# Altium PCB PCB_AlchemyBoxSimple_2024-01-02.pcbdoc
Units mil, origin at the board's own origin, x right, y up, seen from the top; angles counter-clockwise.
Board outline 6810 x 6015 mil, 2 copper layers (Top Layer, Bottom Layer); 48 components, 53 nets, 179 pads, 12 vias.
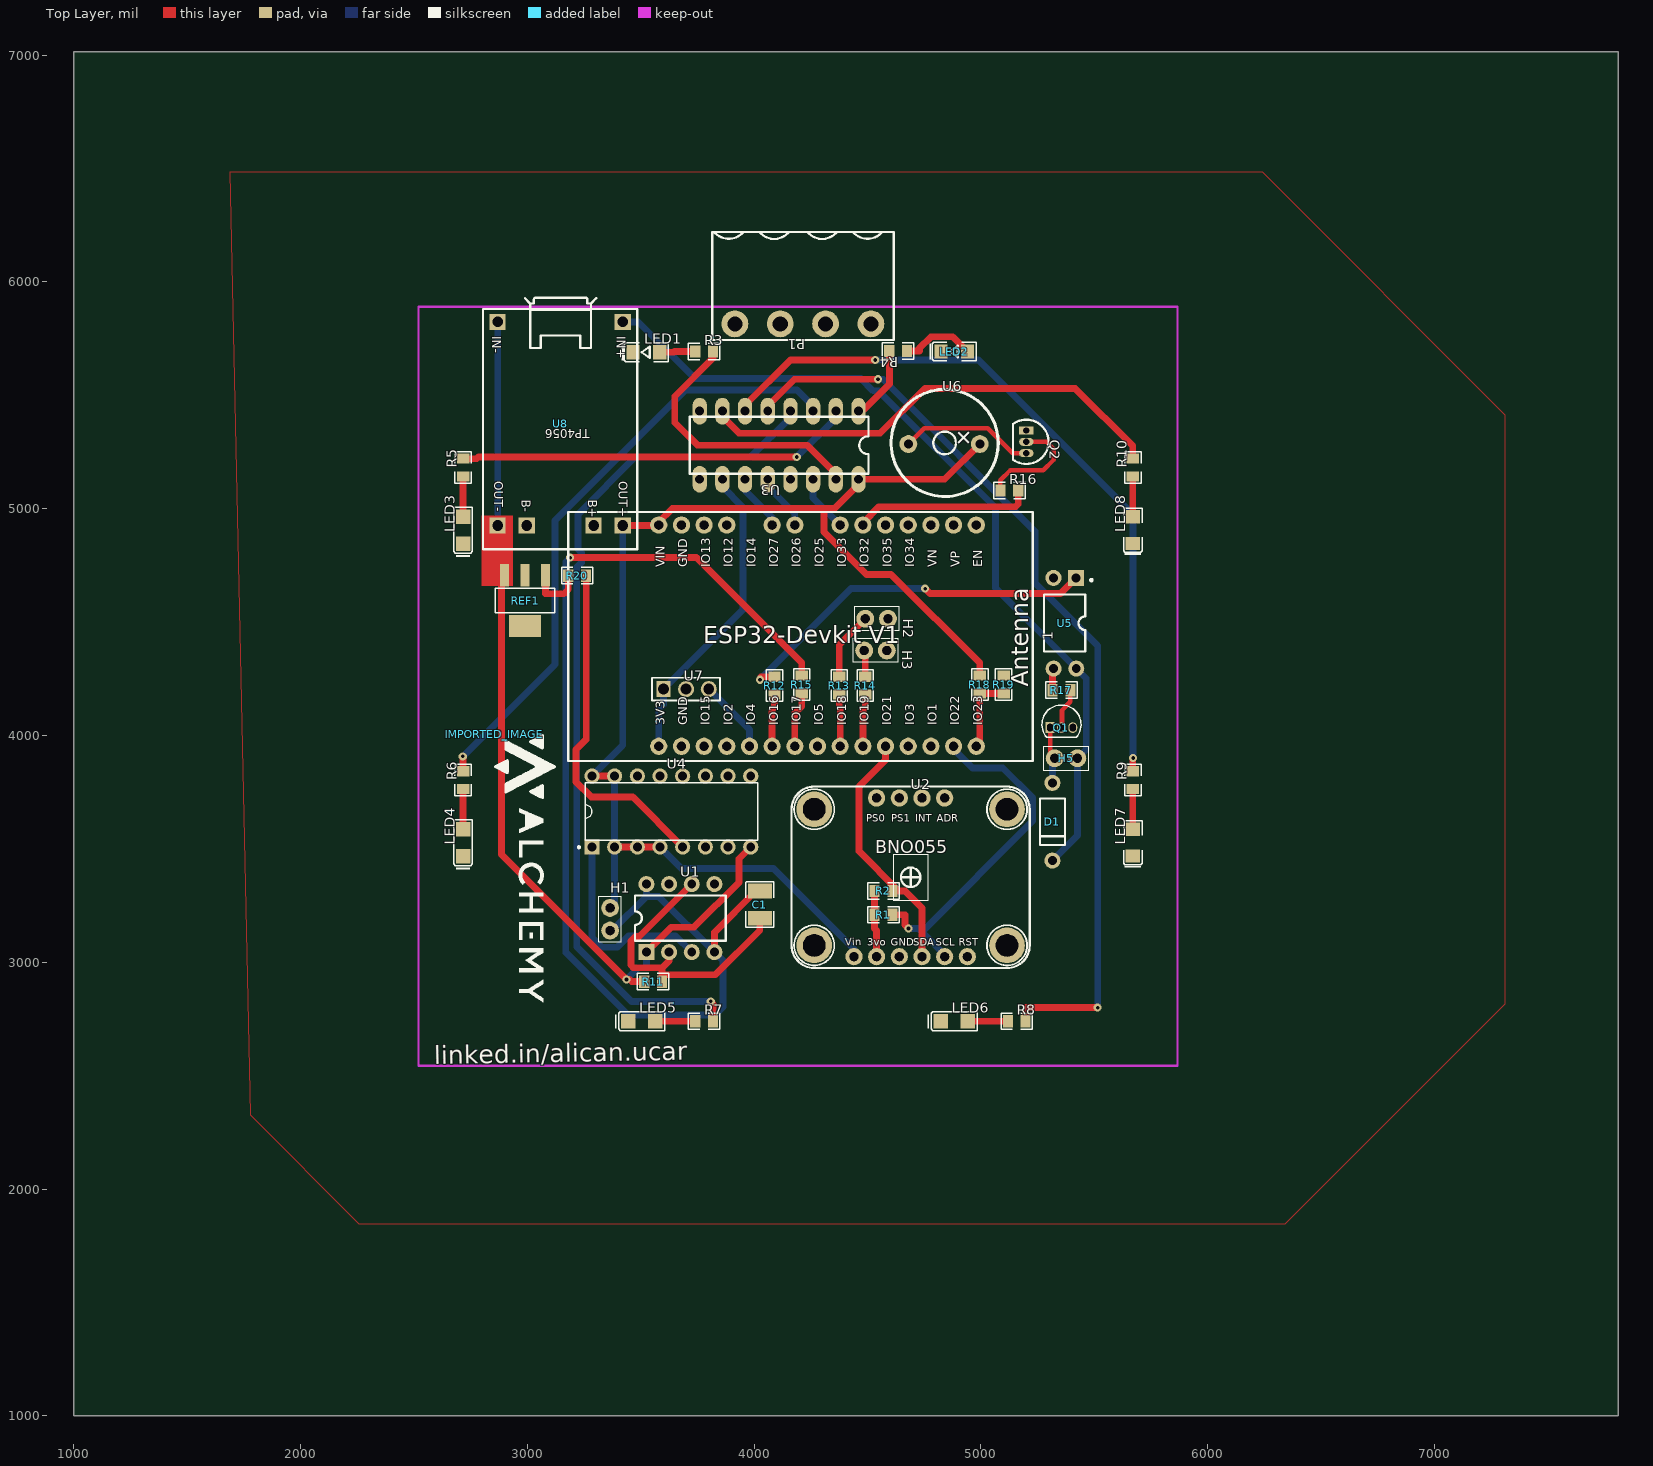
[diagram p0: Top Layer view]
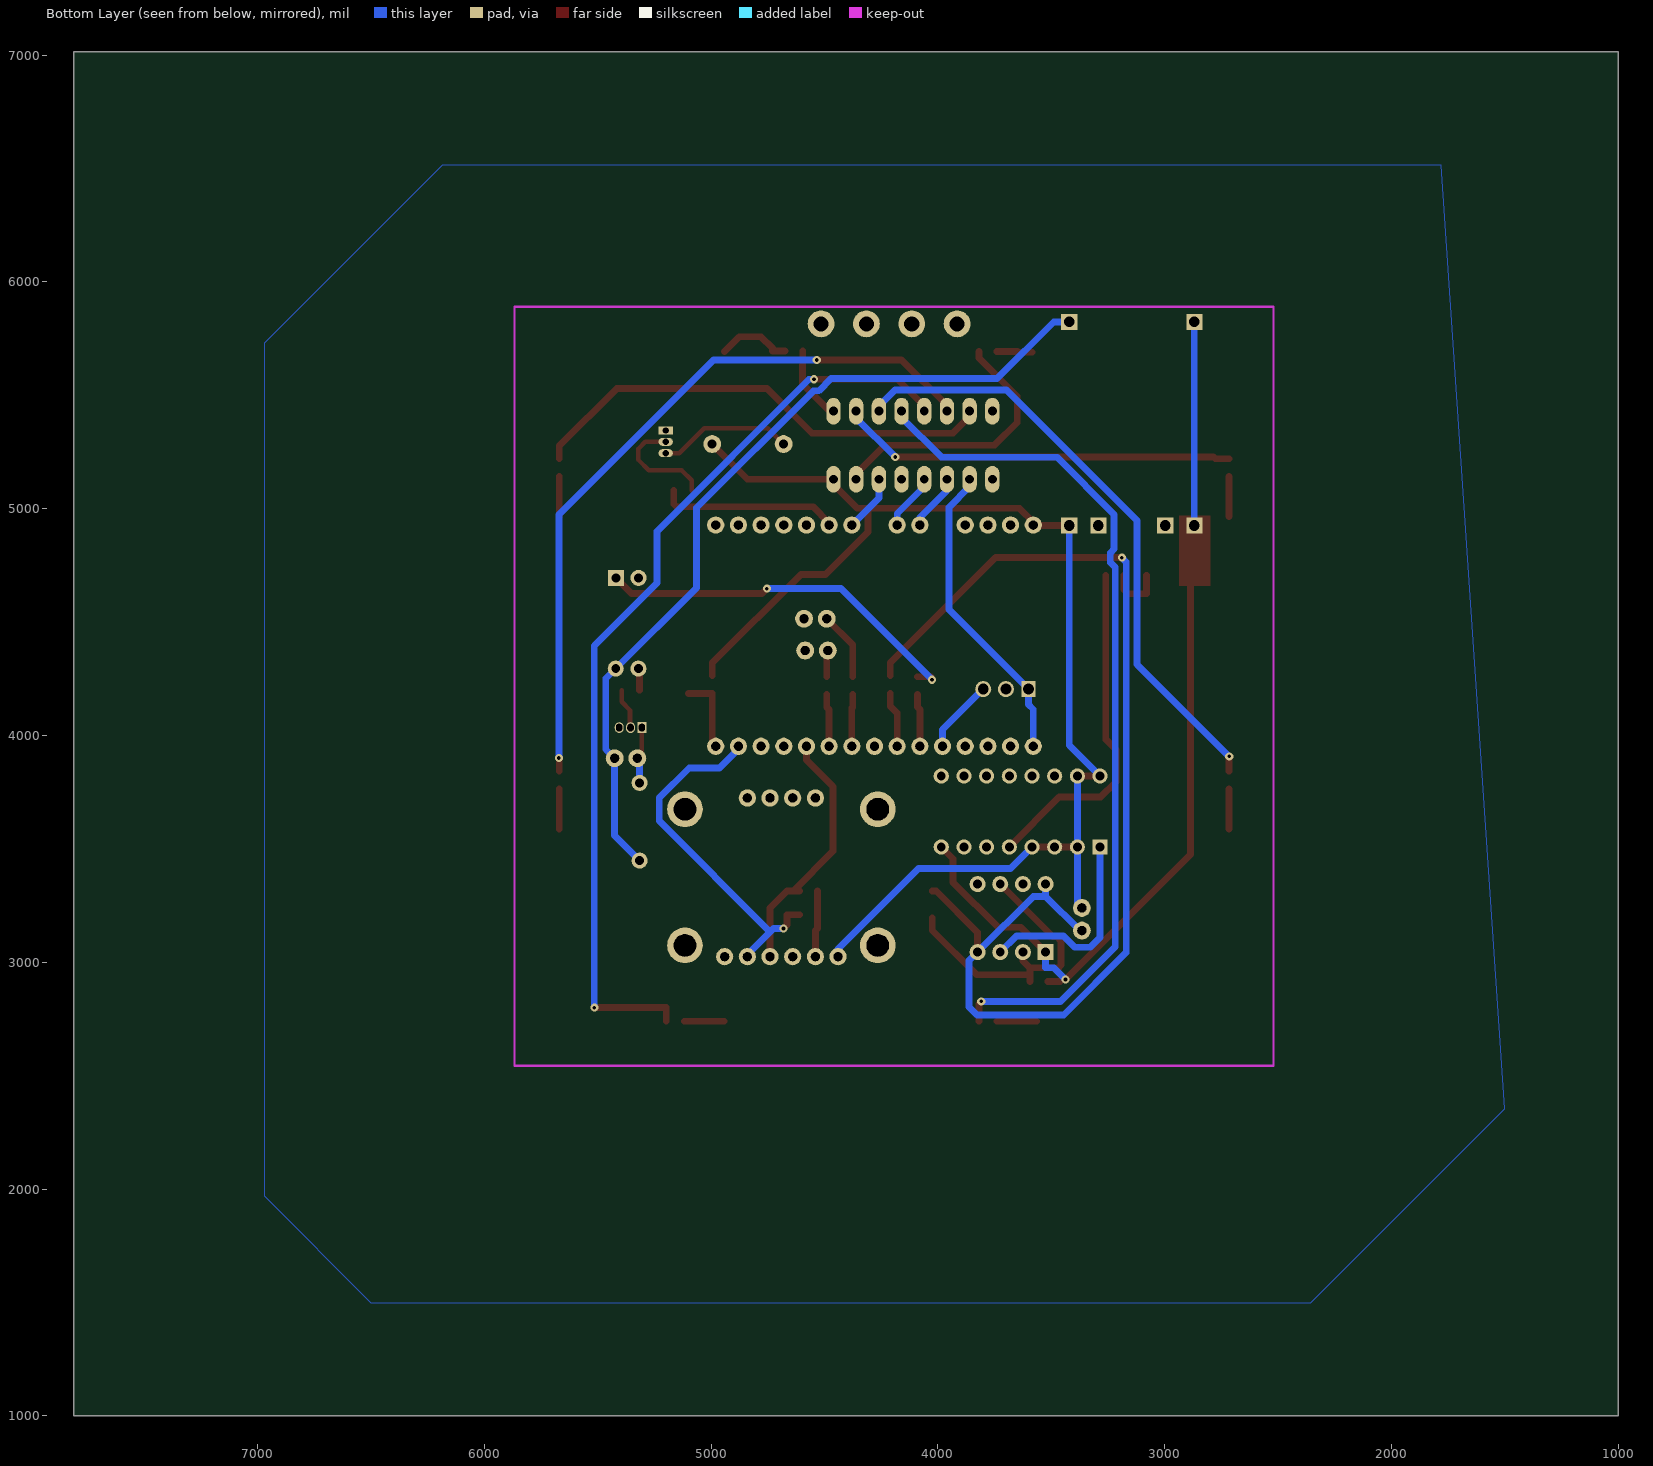
[diagram p1: Bottom Layer view, seen from below]

## Layer stack, top to bottom
Top Layer: signal copper (thickness not stored)
Dielectric: dielectric 12.6, FR-4, Dk 4.8
Bottom Layer: signal copper (thickness not stored)

## Board outline
7810,1000 1000,1000 1000,7015 7810,7015

## Components (designator, comment, footprint, x,y, rotation, side; value= is the part's Value field where it differs from the comment)
1 "ESP32 DEV KIT" ESP32-DEVKITV1_ESP32-DEVKITV1 4305,4160 r270 top
C1 "1210" C1210 4025,3255 r270 top
D1 "1N4007" DO-41_BD2.4-L4.7-P8.70-D0.9-RD 5315,3620 r90 top
H1 "Buton" CONNECTOR_PINHEADER_2.54MM:PINHEADER_1X11_P_2.54MM 3365,3240 r0 top
H2 "Buton" CONNECTOR_PINHEADER_2.54MM:PINHEADER_1X11_P_2.54MM 4590,4515 r270 top
H3 "Buton" CONNECTOR_PINHEADER_2.54MM:PINHEADER_1X11_P_2.54MM 4585,4375 r270 top
H5 "Relay" CONNECTOR_PINHEADER_2.54MM:PINHEADER_1X11_P_2.54MM 5325,3900 r90 top
IMPORTED_IMAGE "IMPORTED_IMAGE" IMPORTED_IMAGE 2855.21,4005.45 r0 top
LED1 "HL-PC-3216S9AC" LED1206-R-RD_RED 3525,5690 r0 top
LED2 "HL-PC-3216S9AC" LED1206-R-RD_RED 4882.2,5693.15 r0 top
LED3 "HL-PC-3216U51GC" LED1206-RD_GREEN 2716.85,4905.75 r90 top
LED4 "HL-PC-3216U51GC" LED1206-RD_GREEN 2716.85,3527.8 r90 top
LED5 "HL-PC-3216U32YC" LED1206-RD_YELLOW-1 3504.25,2740.4 r0 top
LED6 "HL-PC-3216U32YC" LED1206-RD_YELLOW-1 4882.2,2740.4 r0 top
LED7 "HL-PC-3216H203BC" LED1206-R-RD_BLUE 5669.6,3527.8 r90 top
LED8 "HL-PC-3216H203BC" LED1206-R-RD_BLUE 5669.6,4905.75 r90 top
P1 "KF2EDGR-X-5.08-4P" CONN-TH_4P-P5.08_KF2EDGR-X-5.08-4P 4215,5815 r180 top
Q1 "BC547" TO-92-3_L4.5-W3.5-P1.27-L 5355,4035 r0 top
Q2 "2N4401-C118540" TO-92-3_L4.9-W3.7-P1.27-L 5200,5295 r270 top
R1 "3.3kΩ" R0805 4570,3210 r180 top
R2 "3.3kΩ" R0805 4570,3315 r180 top
R3 "110RED" R0805 3779.84,5693.15 r0 top
R4 "110RED" R0805 4635,5695 r180 top
R5 "80Green" R0805 2716.85,5181.34 r90 top
R6 "80Green" R0805 2716.85,3803.39 r90 top
R7 "110Yellow" R0805 3779.84,2740.4 r0 top
R8 "110Yellow" R0805 5157.79,2740.4 r0 top
R9 "80Blue" R0805 5669.6,3803.39 r90 top
R10 "80Blue" R0805 5669.6,5181.34 r90 top
R11 "27K" R0805 3555,2915 r180 top
R12 "80Blue" R0805 4090,4220 r90 top
R13 "10K" R0805 4375,4220 r90 top
R14 "10K" R0805 4490,4220 r90 top
R15 "10K" R0805 4210,4225 r270 top
R16 "1K" R0805 5125,5080 r0 top
R17 "1K" R0805 5355,4200 r180 top
R18 "1K" R0805 4995,4225 r90 top
R19 "1K" R0805 5100,4225 r270 top
R20 "1K" R0805 3220,4705 r0 top
REF1 "IRFL014NTRPBF" SOT-223-4_L6.5-W3.5-P2.30-LS7.0-BR 2990,4595 r90 top
U1 "TLC555CP" DIP-8_L9.7-W6.4-P2.54-LS7.6-BL 3675,3195 r0 top
U2 "BNO055" ADAFRUIT-BNO055 4690,2975 r0 top
U3 "74HC595" 74HC595 4110,5280 r180 top
U4 "SN74HC112N" PDIP-16_L19.3-W6.4-P2.54-LS7.9-BL 3635,3665 r0 top
U5 "EL817MB" DIP-4_L6.5-W4.6-P2.54-LS10.2-BL 5370,4495 r180 top
U6 "Buzzer_Active_12x8" BUZZER_ACTIVE_12X8 4840,5290 r0 top
U7 "microphone" HDR-TH_3P-P2.54-V-M-1 3700,4205 r0 top
U8 "TP4056" TP4056 3145,5375 r180 top

## Footprints (in the part's own frame and the unit in brackets; to place one, negate y for a bottom-side part, rotate by r counter-clockwise, add the part's x,y. Pads: shape width x height; smd on the part's side, far side on the other; paste and mask are expansions set on the pad)
74HC595 [mm]
  oval 1.6x3 hole 1 paste+0 mask+0.051: 1(-8.89,-3.81) 2(-6.35,-3.81) 3(-3.81,-3.81) 4(-1.27,-3.81) 5(1.27,-3.81) 6(3.81,-3.81) 7(6.35,-3.81) 8(8.89,-3.81) 9(8.89,3.81) 10(6.35,3.81) 11(3.81,3.81) 12(1.27,3.81) 13(-1.27,3.81) 14(-3.81,3.81) 15(-6.35,3.81) 16(-8.89,3.81)
  silkscreen extent -10,-3.2 10,3.2
ADAFRUIT-BNO055 [mil]
  round 76 hole 39.36 paste+0 mask+4: 1(-250,50) 2(-150,50) 3(-50,50) 4(50,50) 5(150,50) 6(250,50) 7(150,750) 8(50,750) 9(-50,750) 10(-150,750)
  round 157.48 hole 98.42 slot 98.62 at 0 deg paste+0 mask+4: P$1(-425,100) P$1(-425,700) P$1(425,100) P$1(425,700)
  silkscreen extent -525,0 525,800
BUZZER_ACTIVE_12X8 [mm]
  round 2 hole 1 paste+0 mask+0.102: 1(3.937,-0.127) 2(-4.064,-0.127)
  silkscreen extent -6,-6 6,6
C1210 [mm]
  rect 1.635x2.7 smd paste-100 mask+0.051: 1(-1.517,0) 2(1.517,0)
  silkscreen extent -2.56,-1.58 2.56,1.58
CONN-TH_4P-P5.08_KF2EDGR-X-5.08-4P [mm]
  round 3 hole 1.7 paste+0 mask+0.051: 1(-7.62,0) 2(-2.54,0) 3(2.54,0) 4(7.62,0)
  silkscreen extent -10.16,-10.3 10.16,1.8
CONNECTOR_PINHEADER_2.54MM:PINHEADER_1X11_P_2.54MM [mm]
  round 2 hole 1 slot 1.005 at 0 deg paste+0 mask+0.051: 1(0,0) 2(0,-2.54)
  silkscreen extent -1.33,-3.8 1.27,1.27
DIP-4_L6.5-W4.6-P2.54-LS10.2-BL [mm]
  rect 1.8x1.8 hole 1 paste+0 mask+0.051: 1(-1.265,-5.08)
  round 1.8 hole 1 paste+0 mask+0.051: 2(1.275,-5.08) 3(1.265,5.08) 4(-1.275,5.08)
  silkscreen extent -3.1,-4.97 2.35,3.17
DIP-8_L9.7-W6.4-P2.54-LS7.6-BL [mm]
  rect 1.8x1.8 hole 1 paste+0 mask+0.05: 1(-3.81,-3.81)
  round 1.8 hole 1 paste+0 mask+0.05: 2(-1.27,-3.81) 3(1.27,-3.81) 4(3.81,-3.81) 5(3.81,3.81) 6(1.27,3.81) 7(-1.27,3.81) 8(-3.81,3.81)
  silkscreen extent -5.08,-2.53 5.08,2.53
DO-41_BD2.4-L4.7-P8.70-D0.9-RD [mm]
  round 1.8 hole 1 paste+0 mask+0.051: 1(-4.35,0) 2(4.35,0)
  silkscreen extent -2.6,-1.4 2.6,1.4
ESP32-DEVKITV1_ESP32-DEVKITV1 [mil]
  round 76 hole 39.36 paste+0 mask+2: 3V3(207.32,-725.64) D2(207.32,-425.64) D4(207.32,-325.64) D5(207.32,-25.64) D12(-767.89,-425.64) D13(-767.89,-525.64) D15(207.32,-525.64) D18(207.32,74.36) D19(207.32,174.36) D21(207.31,274.36) D22(207.31,574.36) D23(207.31,674.36) D26(-767.89,-125.64) D27(-767.89,-225.64) D32(-767.89,174.36) D33(-767.89,74.36) D34(-767.89,374.36) D35(-767.89,274.36) EN(-767.89,674.36) GND(207.32,-625.64) GND2(-767.89,-625.64) RX0(207.31,374.36) RX2(207.32,-225.64) TX0(207.31,474.36) TX2(207.32,-125.64) VIN(-767.89,-725.64) VN(-767.89,474.36) VP(-767.89,574.36)
  silkscreen extent -826,-1124 273,923
HDR-TH_3P-P2.54-V-M-1 [mm]
  rect 1.575x1.8 hole 1.2 paste+0 mask+0.051: 1(-2.54,0)
  round 1.8 hole 1.2 paste+0 mask+0.051: 2(0,0) 3(2.54,0)
  silkscreen extent -3.81,-1.27 3.81,1.27
IMPORTED_IMAGE [mil]
  silkscreen extent 0,-1181 270,0
LED1206-R-RD_BLUE [mm]
  rect 1.485x1.62 smd paste-100 mask+0.051: 1(1.492,0) 2(-1.493,0)
  silkscreen extent -2.77,-1.04 2.46,1.04
LED1206-R-RD_RED [mm]
  rect 1.485x1.62 smd paste-100 mask+0.051: 1(1.493,0) 2(-1.492,0)
  silkscreen extent -2.77,-1.04 2.46,1.04
LED1206-RD_GREEN [mm]
  rect 1.635x1.6 smd paste-100 mask+0.051: 1(-1.517,0) 2(1.517,0)
  silkscreen extent -2.99,-1.04 2.57,1.07
LED1206-RD_YELLOW-1 [mm]
  rect 1.635x1.6 smd paste-100 mask+0.051: 1(-1.517,0) 2(1.517,0)
  silkscreen extent -2.99,-1.04 2.57,1.07
PDIP-16_L19.3-W6.4-P2.54-LS7.9-BL [mm]
  rect 1.7x1.7 hole 1 paste+0 mask+0.051: 1(-8.89,-3.97)
  round 1.7 hole 1 paste+0 mask+0.051: 2(-6.35,-3.97) 3(-3.81,-3.97) 4(-1.27,-3.97) 5(1.27,-3.97) 6(3.81,-3.97) 7(6.35,-3.97) 8(8.89,-3.97) 9(8.89,3.97) 10(6.35,3.97) 11(3.81,3.97) 12(1.27,3.97) 13(-1.27,3.97) 14(-3.81,3.97) 15(-6.35,3.97) 16(-8.89,3.97)
  silkscreen extent -10.46,-4.1 9.65,3.2
R0805 [mil]
  rect 44.59x54.21 smd paste-3937.01 mask+2: 1(-39.37,0) 2(39.37,0)
  silkscreen extent -69,-36 69,36
SOT-223-4_L6.5-W3.5-P2.30-LS7.0-BR [mm]
  rect 2.47x0.98 smd paste+0 mask+0.051: 1(2.835,-2.3) 2(2.835,0) 3(2.835,2.3)
  rect 2.47x3.6 smd paste+0 mask+0.051: 4(-2.835,0)
  silkscreen extent -1.37,-3.33 1.37,3.33
TO-92-3_L4.5-W3.5-P1.27-L [mm]
  rect 1x1.2 hole 0.7 slot 0.85 at 90 deg paste+0 mask+0.051: 1(-1.27,0)
  oval 1x1.2 hole 0.7 slot 0.85 at 90 deg paste+0 mask+0.051: 2(0,0) 3(1.27,0)
  silkscreen extent -2.19,-1.1 2.19,2.52
TO-92-3_L4.9-W3.7-P1.27-L [mm]
  rect 0.9x1.6 hole 0.7 paste+0 mask+0.051: 1(-1.27,0)
  oval 0.9x1.6 hole 0.7 paste+0 mask+0.051: 2(0,0) 3(1.27,0)
  silkscreen extent -2.48,-1.5 2.48,2.48
TP4056 [mm]
  rect 1.8x1.8 hole 1.199 paste+0 mask+0.051: 1(-7,11.402) 2(-3.749,11.402) 3(3.749,11.402) 4(7,11.402) 5(-7,-11.402) 6(7,-11.402)
  silkscreen extent -8.63,-14.11 8.64,14.07

## Via types
v1: diameter 36.02, hole 16.02, Top Layer to Bottom Layer, tented both sides, 12 vias

## Nets (pads, with @x,y where several pads share a name; then routed paths per layer and width w, separated by ;. In a path a pad name is that pad's centre, name@x,y a point inside that pad or via, vN(x,y) a via of type N, cw(c..) or ccw(c..) an arc to the next point about the centre after c; other vN are vias at no path point)
1_RX2: 1.RX2 R12.1 | length 232.4
  Top Layer w30: 1.RX2 4079.36,4114.72 4090,4125.36 R12.1
3.3V: 1.3V3 U3.10 U7.1 | length 1368.9
  Bottom Layer w30: 1.3V3 3579.36,4115.96 3600,4136.6 U7.1 3950.92,4555.92 3950.92,5006.22 3860,5097.14 U3.10
+5V: D1.1 H5.2 U5.4 U8.5 | length 3766.2
  Bottom Layer w30: U8.5 3489,5823.9 3739.28,5573.62 4471.07,5573.62 4524.89,5519.8 4548.82,5519.8 5064.33,5004.29 5064.33,4650.87 U5.4 5464.18,4251.02 5464.18,3939.18 H5.2 5425,3558.74 D1.1
BATCAPACITY: 1.D23 R18.1 R19.2 | length 344.4
  Top Layer w30: 1.D23 4995,3968.32 R18.1 R19.2
BUTON1: 1.TX2 R15.2 | length 245.6
  Top Layer w30: 1.TX2 4179.36,4099.72 4210,4130.36 R15.2
BUTON2: 1.D18 R13.1 | length 229.8
  Top Layer w30: R13.1 4375,4125.36 4379.36,4121 1.D18
BUTON3: 1.D19 R14.1 | length 232.4
  Top Layer w30: 1.D19 4479.36,4114.72 4490,4125.36 R14.1
BUZZER: 1.D32 R16.2 | length 789.2
  Top Layer w30: 1.D32 4479.36,4938.03 4550.29,5008.96 5153.41,5008.96 5164.37,5019.92 R16.2
COUT: U1.3 U4.1 | length 906.8
  Bottom Layer w30: U4.1 3285,3110.25 3328.78,3066.47 3396.17,3066.47 3446.01,3116.31 3653.69,3116.31 U1.3
GND: 1.GND 1.GND2 H2.1 H3.1 LED1.2 LED2.2 LED3.1 LED4.1 LED5.1 LED6.1 LED7.2 LED8.2 Q1.3 Q2.1 R19.1 REF1.2 REF1.4 U2.3 U3.8 U3.13 U5.2 U7.2
GNDB: R11.2 REF1.3 U1.1 U4.8 U8.4 U8.6 | length 4126.7
  Top Layer w30: U8.4 2869.4,4816.9 2867.5,4815 2894.29,4788.21 2899.45,4788.21 REF1.3@2899.45,4708.91 ; REF1.3 REF1.3@2899.45,4708.91 ; R11.2 3460.36,2915 3450.97,2924.39 v1(3436.97,2924.39) 2885.78,3475.58 2885.78,4695.24 REF1.3@2899.45,4708.91 ; U1.1 3635.08,3155.08 3735.8,3155.08 3933.12,3352.4 3933.12,3456.82 U4.8
  Bottom Layer w30: U8.4 U8.6 ; v1(3436.97,2924.39) 3489.18,2976.6 3525,2976.6 U1.1
H2_2: H2.2 R13.2 | length 303.3
  Top Layer w30: R13.2 4375,4400 H2.2
H3_2: H3.2 R14.2 | length 117.7
  Top Layer w30: H3.2 4490,4370 R14.2
H5_1: D1.2 H5.1 Q1.1 | length 256.2
  Top Layer w20: Q1.1 5305,3920 H5.1
  Bottom Layer w30: D1.2 5315,3890 H5.1
MICROPHONE: 1.D4 U7.3 | length 326.6
  Bottom Layer w30: U7.3 3979.36,4025.64 1.D4
MOUT: R20.2 U4.5 | length 1516.3
  Top Layer w30: R20.2 3259.37,3982.38 3215.18,3938.19 3215.18,3795.64 3282.24,3728.58 3465.12,3728.58 U4.5
P1_1: P1.1
P1_2: P1.2
P1_3: P1.3
P1_4: P1.4
Q1_2: Q1.2 R17.1 | length 181.3
  Top Layer w20: Q1.2 5357.29,4037.29 5357.29,4112.29 5394.37,4149.37 R17.1
R3_1: LED1.1 R3.1 | length 158
  Top Layer w30: LED1.1 3645.96,5690 3649.11,5693.15 R3.1
R4_1: LED2.1 R4.1 | length 327.7
  Top Layer w30: R4.1 4729.64,5695 4729.64,5708.82 4778.88,5758.06 4876.05,5758.06 LED2.1@4940.96,5693.15
R5_1: LED3.2 R5.1 | length 176.5
  Top Layer w30: LED3.2 R5.1
R6_1: LED4.2 R6.1 | length 176.5
  Top Layer w30: LED4.2 R6.1
R7_1: LED5.2 R7.1 | length 176.5
  Top Layer w30: LED5.2 R7.1
R8_1: LED6.2 R8.1 | length 176.5
  Top Layer w30: LED6.2 R8.1
R9_1: LED7.1 R9.1 | length 177.5
  Top Layer w30: LED7.1 R9.1
R10_1: LED8.1 R10.1 | length 177.5
  Top Layer w30: LED8.1 R10.1
R16_1: Q2.2 R16.1 | length 499.5
  Top Layer w20: R16.1 5085.6,5125.6 5130,5170 5275,5170 5320,5215 5320,5265 5290,5295 Q2.2
REF1_1: R20.1 REF1.1 | length 250
  Top Layer w30: REF1.1 3080.55,4625.02 3160.73,4625.02 3180.63,4644.92 R20.1
U1_2: C1.2 R11.1 U1.2 U1.6 | length 1330.2
  Top Layer w30: R11.1 3594.37,2945.04 ; U1.2 3625,3005.71 3594.37,2975.08 ; U1.6 3493.44,3113.44 3475.89,3113.44 3456.55,3094.1 3456.55,2987.76 3468.47,2975.84 3593.61,2975.84 3594.37,2975.08 ; C1.2 4025,3141.63 3828.41,2945.04 3594.37,2945.04 ; 3594.37,2945.04 3594.37,2975.08
U2_2: R1.2 R2.2 U2.2 | length 293.9
  Top Layer w30: R2.2 R1.2 4530.63,3149.92 4540,3140.55 U2.2
U2_4: 1.D21 R2.1 U2.4 | length 1135.4
  Top Layer w30: 1.D21 4579.36,3892.13 4461.85,3774.62 4461.85,3490.16 4637.01,3315 ; R2.1 4637.01,3315 ; U2.4 4740,3239.64 4664.64,3315 4637.01,3315
U2_5: 1.D22 R1.1 U2.5 | length 1582.2
  Top Layer w30: R1.1 4664.64,3210 4664.64,3165.28 v1(4680.64,3149.28)
  Bottom Layer w30: v1(4680.64,3149.28) 4724.61,3149.28 4739.1,3134.8 ; U2.5 4840,3033.89 4739.1,3134.8 ; 1.D22 4879.36,3940.75 4962.77,3857.34 5096.11,3857.34 5228.75,3724.7 5228.75,3624.45 4739.1,3134.8
U3_1: R4.2 U3.1 | length 332.5
  Top Layer w30: U3.1 4477.34,5430 4597.03,5549.69 4597.03,5633.52 4595.63,5634.92 R4.2
U3_2: R5.2 U3.2 | length 1747.1
  Top Layer w30: R5.2 2776.93,5220.71 2784.42,5228.2 v1(4187.59,5228.2)
  Bottom Layer w30: v1(4187.59,5228.2) 4360,5400.61 U3.2
U3_3: R6.2 U3.3 | length 2703.1
  Top Layer w30: v1(2715.58,3908.07) 2716.85,3906.8 R6.2
  Bottom Layer w30: v1(2715.58,3908.07) 3121.59,4314.08 3121.59,4947.82 3697.61,5523.84 4189.19,5523.84 4260,5453.03 U3.3
U3_4: R7.2 U3.4 | length 3845.8
  Top Layer w30: v1(3808.47,2827.72) 3819.21,2816.98 R7.2
  Bottom Layer w30: v1(3808.47,2827.72) 3459.04,2827.72 3217.63,3069.13 3217.63,4741.52 3239.55,4763.44 3239.55,4805.7 3223.11,4822.14 3223.11,4974.85 3475.35,5227.09 3984.66,5227.09 4160,5402.43 U3.4
U3_5: R8.2 U3.5 | length 4119.5
  Top Layer w30: U3.5 4060,5453.03 4177.79,5570.82 v1(4546.01,5570.82) ; R8.2 5197.16,2800.48 v1(5514.56,2800.48)
  Bottom Layer w30: v1(4546.01,5570.82) 4567.55,5570.82 5237.91,4900.46 5237.91,4672.64 5514.56,4395.99 v1(5514.56,2800.48)
U3_6: R9.2 U3.6 | length 3234.4
  Top Layer w30: U3.6 3960,5456.18 4159.72,5655.9 v1(4534.29,5655.9) ; R9.2 5669.6,3899.91 v1(5670.96,3901.27)
  Bottom Layer w30: v1(4534.29,5655.9) 4989.46,5655.9 5670.96,4974.4 v1(5670.96,3901.27)
U3_7: R10.2 U3.7 | length 2105.6
  Top Layer w30: U3.7 3860,5406.2 3933,5333.2 4556,5333.2 4752.8,5530 5415.6,5530 5669.6,5276 R10.2
U3_11: 1.D27 U3.11 | length 251.6
  Bottom Layer w30: U3.11 3960,5081.28 4079.36,4961.92 1.D27
U3_12: 1.D26 U3.12 | length 251.6
  Bottom Layer w30: U3.12 4060,5097.14 4179.36,4977.78 1.D26
U3_14: 1.D33 U3.14 | length 251.6
  Bottom Layer w30: U3.14 4260,5047.24 1.D33
U3_15: R3.2 U3.15 | length 1210.2
  Top Layer w30: R3.2@3819.2,5693.1 3819.2,5664.2 3650,5495 3650,5380 3750,5280 4233,5280 4360,5153 U3.15
U5_1: R12.2 U5.1 | length 1672.9
  Top Layer w30: v1(4025.58,4246.15) 4029.92,4250.49 4029.92,4259.37 R12.2 ; v1(4754.01,4647.85) 4775.38,4626.48 5351.27,4626.48 U5.1
  Bottom Layer w30: v1(4025.58,4246.15) 4427.28,4647.85 v1(4754.01,4647.85)
U5_3: R17.2 U5.3 | length 96.9
  Top Layer w30: R17.2 5315.63,4290.43 U5.3
U6_2: Q2.3 U6.2 | length 594.7
  Top Layer w20: U6.2 4750.23,5355.23 5029.77,5355.23 5140,5245 Q2.3
U8_2: U8.2
U8_3: U8.3
VCC: 1.VIN H1.1 R18.2 U2.1 U3.16 U4.2 U4.3 U4.4 U4.15 U4.16 U6.1 U8.1 | length 5956.1
  Top Layer w30: U4.16 U4.15 ; U4.2 U4.3 U4.4 ; U8.1 3577.58,4926.1 1.VIN 3579.37,4941.65 3639.56,5001.84 4307.84,5001.84 ; R18.2 4995,4319.64 4603.99,4710.65 4495.27,4710.65 4307.84,4898.08 4307.84,5001.84 ; U6.1 4840,5130 U3.16 4460,5106.54 4355.3,5001.84 4307.84,5001.84
  Bottom Layer w30: U4.16 3420.6,3956.9 3420.6,4857.7 U8.1 ; H1.1 3385,3260 U4.2 U4.15 ; U4.4 3680.25,3413.45 4084.85,3413.45 4440,3058.3 U2.1
VDD: C1.1 H1.2 R15.1 U1.4 U1.8 | length 5137.3
  Top Layer w30: v1(3188.53,4784.57) 3745.07,4784.57 4210,4319.64 R15.1 ; U1.4 3825,3132.6 4007.14,3314.74 C1.1
  Bottom Layer w30: v1(3188.53,4784.57) 3169.61,4765.65 3169.61,3043.71 3445.03,2768.29 3826.52,2768.29 3862.06,2803.83 3862.06,3007.94 U1.4 3579.2,3290.8 3525,3290.8 ; H1.2 3374.2,3140 3525,3290.8 ; U1.8 3525,3290.8
pads on no net: 1.D2 1.D5 1.D12 1.D13 1.D15 1.D34 1.D35 1.EN 1.RX0 1.TX0 1.VN 1.VP U1.5 U1.7 U2.6 U2.7 U2.8 U2.9 U2.10 U2.P$1 U3.9 U4.6 U4.7 U4.9 U4.10 U4.11 U4.12 U4.13 U4.14

## Polygon pours and split planes (outlines as drawn)
GND on Bottom Layer (solid): 1780,6515 6185,6515 6970,5730 6970,1970 6500,1500 2355,1500 1500,2355
GND on Top Layer (solid): 1690,6485 6240,6485 7310,5415 7310,2815 6340,1845 2260,1845 1780,2325

## Other copper
Top Layer:
  region net GNDB: 2935,4970 2935,4660 2800,4660 2800,4970 2935,4970

## Silkscreen, mask and mechanical layers (free items; w line width, h text height)
Top Overlay:
  text "linked.in/alican.ucar" at 2590.7,2550.01 h80 r1

## Text inside footprints (layer, text, board x,y; h text height)
1: Document "ESP32-DEVKITV1" at 4676.6,3807.01 h50; Top Overlay "3V3" at 3605.34,4044.81 h40 r90; Top Overlay "GND" at 3705.34,4044.81 h40 r90; Top Overlay "IO15" at 3805.34,4044.81 h40 r90; Top Overlay "IO2" at 3905.34,4044.81 h40 r90; Top Overlay "IO4" at 4005.34,4044.81 h40 r90; Top Overlay "IO16" at 4105.34,4044.81 h40 r90; Top Overlay "IO17" at 4205.34,4044.81 h40 r90; Top Overlay "IO5" at 4305.34,4044.81 h40 r90; Top Overlay "IO18" at 4405.34,4044.81 h40 r90; Top Overlay "IO19" at 4505.34,4044.81 h40 r90; Top Overlay "IO21" at 4605.34,4044.81 h40 r90; Top Overlay "IO3" at 4705.34,4044.81 h40 r90; Top Overlay "IO1" at 4805.34,4044.81 h40 r90; Top Overlay "IO22" at 4905.34,4044.81 h40 r90; Top Overlay "IO23" at 5005.34,4044.81 h40 r90; Top Overlay "VIN" at 3606.13,4742.44 h40 r90; Top Overlay "GND" at 3706.13,4742.44 h40 r90; Top Overlay "IO13" at 3806.13,4742.44 h40 r90; Top Overlay "IO12" at 3906.13,4742.44 h40 r90; Top Overlay "IO14" at 4006.13,4742.44 h40 r90; Top Overlay "IO27" at 4106.13,4742.44 h40 r90; Top Overlay "IO26" at 4206.13,4742.44 h40 r90; Top Overlay "IO25" at 4306.13,4742.44 h40 r90; Top Overlay "IO33" at 4406.13,4742.44 h40 r90; Top Overlay "IO32" at 4506.13,4742.44 h40 r90; Top Overlay "IO35" at 4606.13,4742.44 h40 r90; Top Overlay "IO34" at 4706.13,4742.44 h40 r90; Top Overlay "VN" at 4806.13,4742.44 h40 r90; Top Overlay "VP" at 4906.13,4742.44 h40 r90; Top Overlay "EN" at 5006.13,4742.44 h40 r90; Top Overlay "ESP32-Devkit V1" at 3775,4407 h76; Top Overlay "Antenna" at 5207.75,4215.75 h76 r90
U2: Top Overlay "ADR" at 4805,3619 h32; Top Overlay "3vo" at 4497.67,3074 h32; Top Overlay "PS1" at 4605,3619 h32; Top Overlay "PS0" at 4495,3619 h32; Top Overlay "RST" at 4903.18,3074 h32; Top Overlay "INT" at 4710,3619 h32; Top Overlay "SCL" at 4801.6,3074 h32; Top Overlay "SDA" at 4701.6,3074 h32; Top Overlay "GND" at 4601.6,3074 h32; Top Overlay "Vin" at 4400.86,3074.01 h32 r2
U6: Document "+" at 4932.16,5367.84 h78.74 r225; Top Overlay "+" at 4932.16,5367.84 h78.74 r225
U8: Top Overlay "OUT+" at 3403.82,5121.2 h39.37 r270; Top Overlay "B+" at 3269.32,5039.8 h39.37 r270; Top Overlay "B-" at 2975.51,5040.1 h39.37 r270; Top Overlay "OUT-" at 2853.82,5121.2 h39.37 r270; Top Overlay "IN+" at 3395.32,5761.4 h39.37 r270; Top Overlay "IN-" at 2845.32,5761.4 h39.37 r270